# Altium PCB PCB1.PcbDoc
Units mm, origin at the board's own origin, x right, y up, seen from the top; angles counter-clockwise.
Board outline 30.61 x 25.65 mm, 4 copper layers (Top Layer, VCC, GND, Bottom Layer); 30 components, 36 nets, 171 pads, 102 vias.
Unrouted connection lines stored in the file: 1.
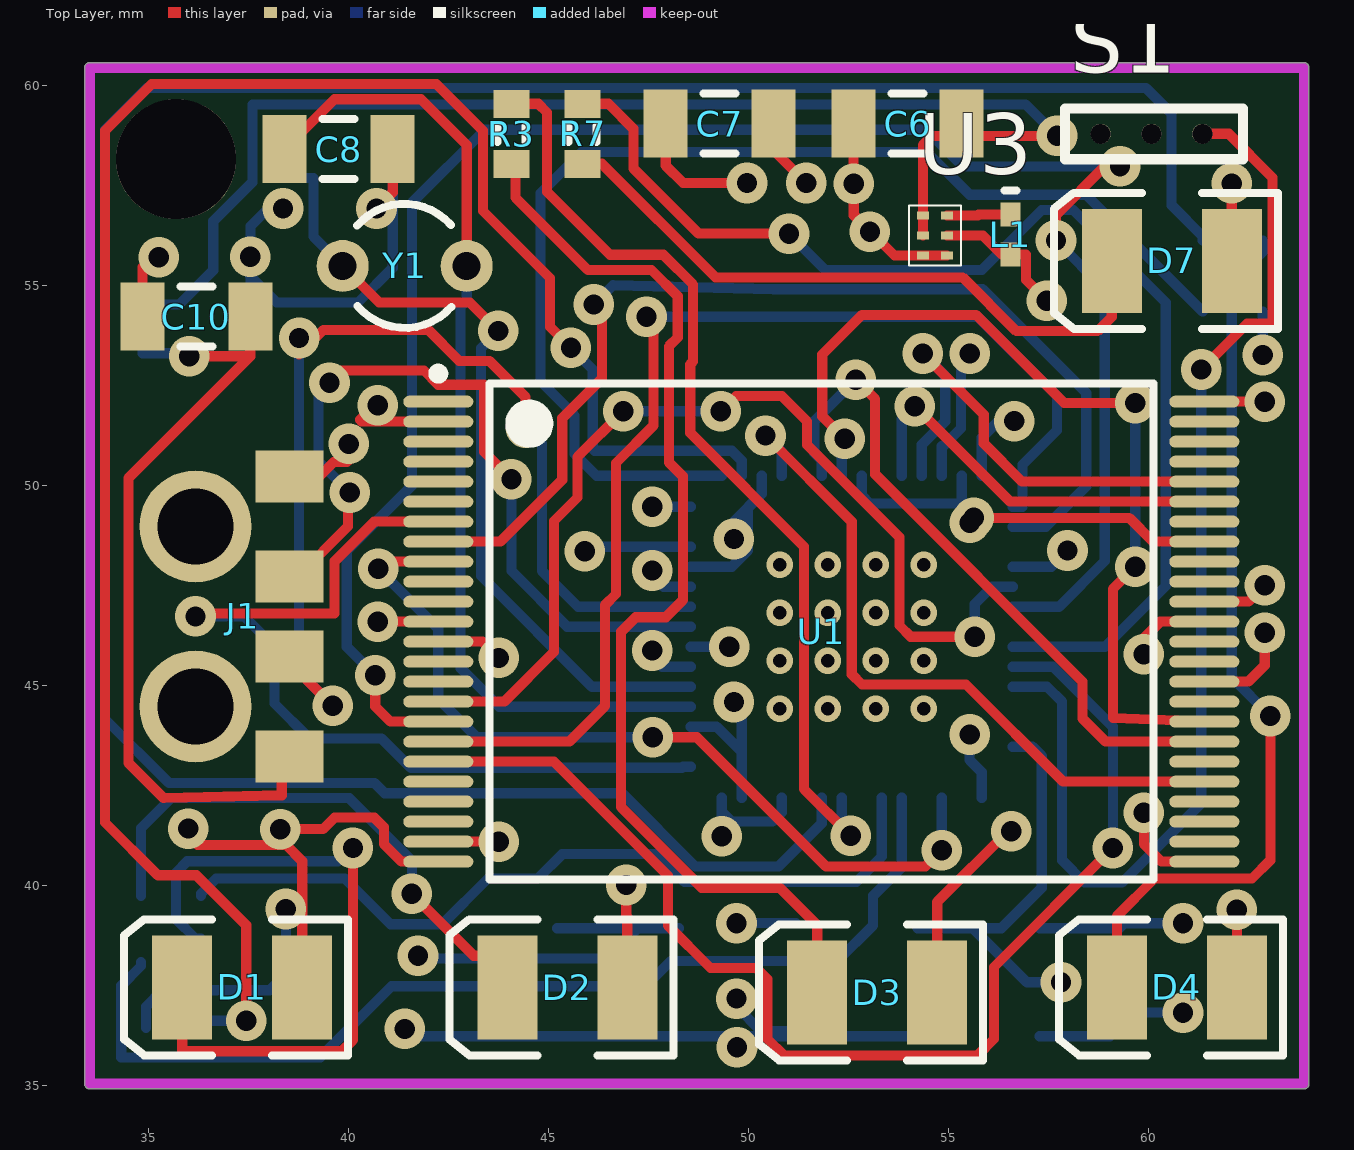
[diagram p0: Top Layer view]
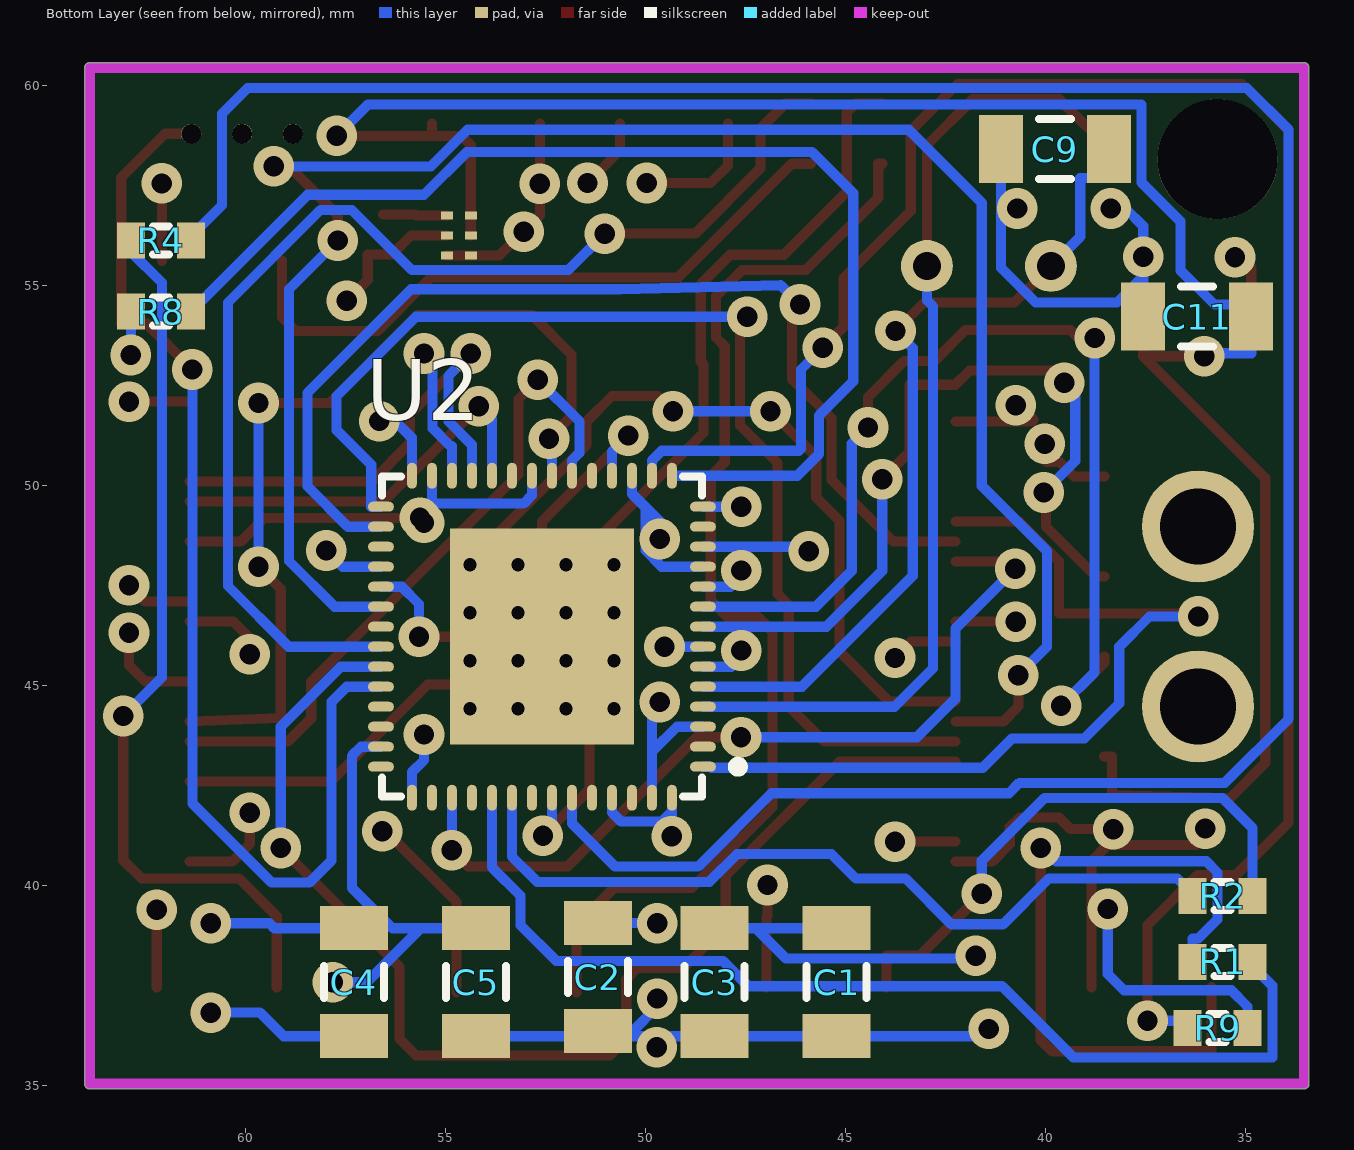
[diagram p1: Bottom Layer view, seen from below]
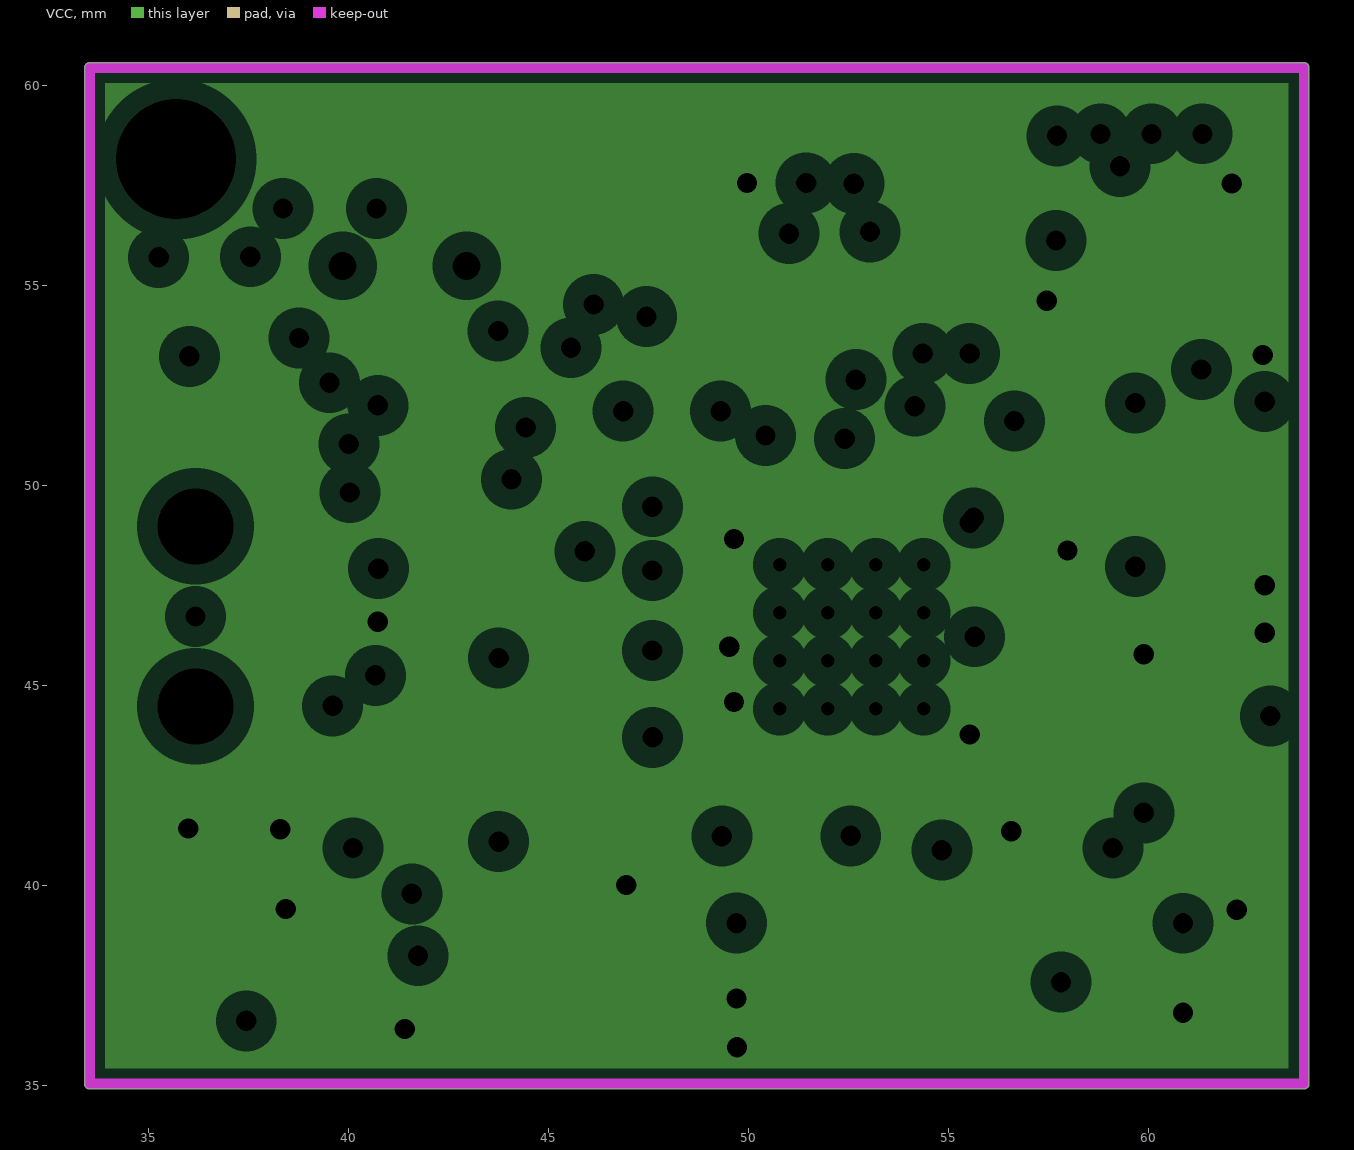
[diagram p2: VCC, clearances drawn from the general rule]
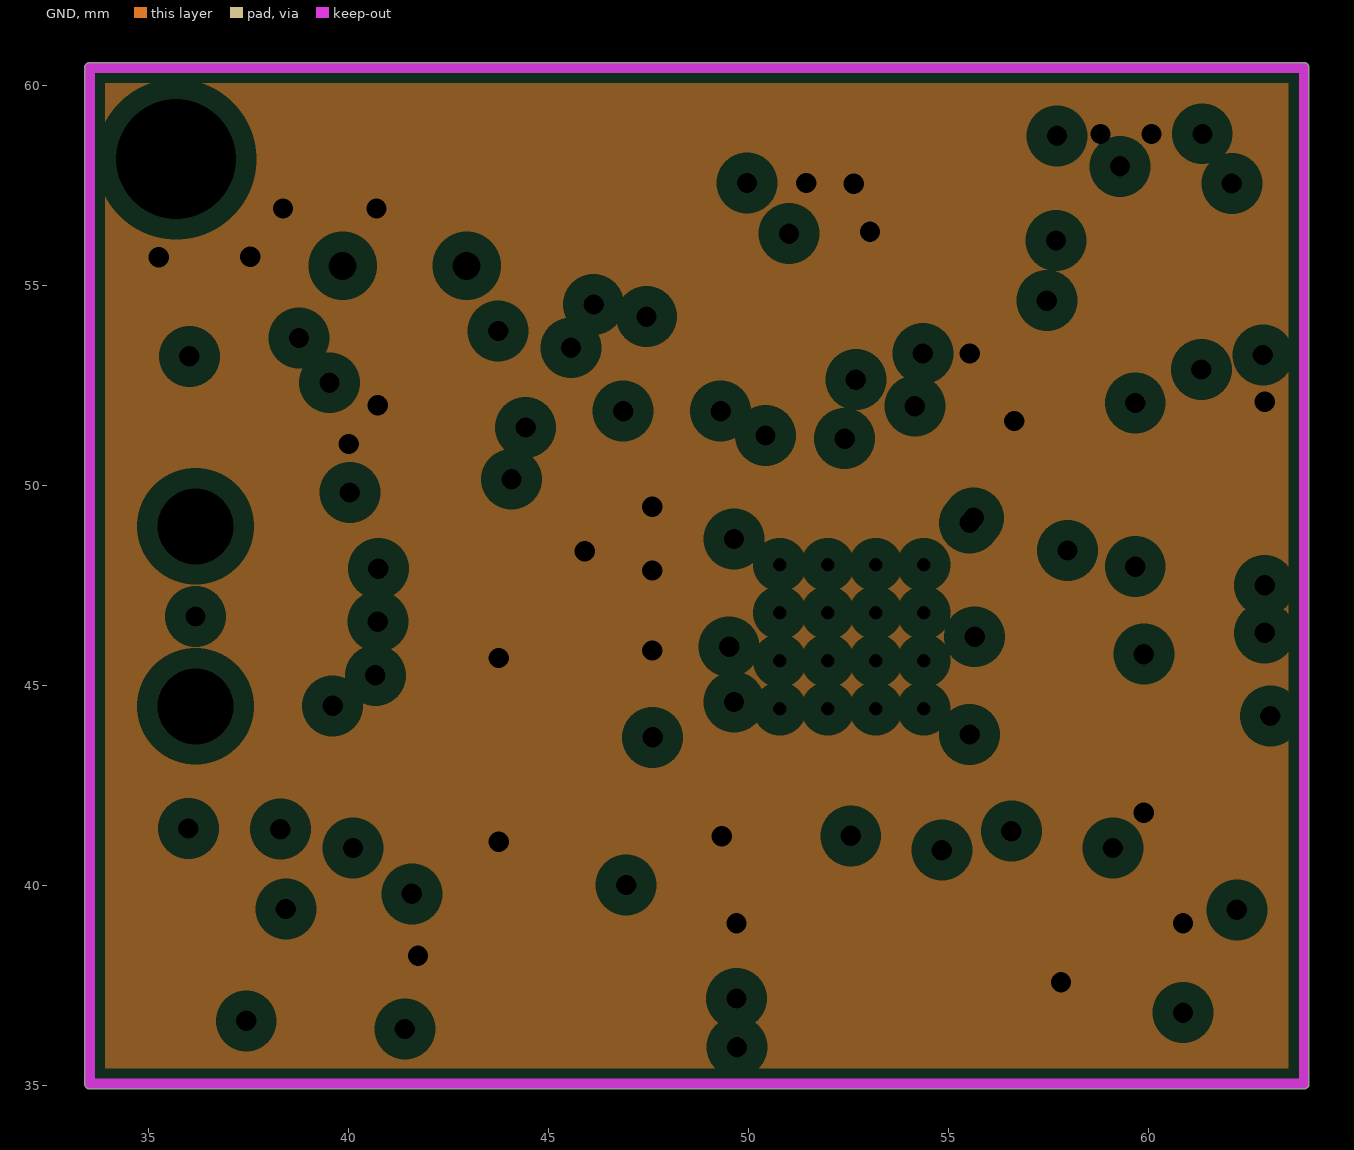
[diagram p3: GND, clearances drawn from the general rule]

## Layer stack, top to bottom
Top Layer: signal copper 0.0356
Dielectric: core 0.32, FR-4, Dk 4.8
VCC: plane copper 0.254, net V3_3
Dielectric: prepreg 0.32, FR-4, Dk 4.8
GND: plane copper 0.254, net GND
Dielectric: core 0.32, FR-4, Dk 4.8
Bottom Layer: signal copper 0.0356

## Board outline
33.528,34.925 cw(c33.528,35.052) 33.401,35.052 33.401,60.452 cw(c33.528,60.452) 33.528,60.579 63.881,60.579 cw(c63.881,60.452) 64.008,60.452 64.008,35.052 cw(c63.881,35.052) 63.881,34.925

## Design rules (kind name [scope] priority, off if disabled: settings)
Clearance [All] p1: gap=0.127
PlaneClearance [All] p1: clearance=0.508
PlaneConnect [All] p1: planeconnectstyle=Relief reliefexpansion=0.508 reliefentries=4 reliefconductorwidth=0.254 reliefairgap=0.254
PolygonConnect [All] p1: connectstyle=Relief reliefconductorwidth=0.254 reliefentries=4 polygonreliefangle="90 Angle" airgapwidth=0.254
RoutingVias [All] p1: holewidth=0.508 width=1.016 viastyle="Through Hole" minholewidth=0.508 minwidth=1.016 maxholewidth=0.508 maxwidth=1.016
SilkscreenOverComponentPads [All] p1: minsilkscreentomaskgap=0.254
SolderMaskExpansion [All] p1: expansion=0.102
Width [All] p1: maxlimit=0.254 minlimit=0.254 preferedwidth=0.254
25 further rules are at their usual default settings.

## Components (designator, comment, footprint, x,y, rotation, side; value= is the part's Value field where it differs from the comment)
C1 "Cap Semi" CAPC3216L 45.212,37.592 r270 bottom
C2 "Cap Semi" CAPC3216L 51.181,37.719 r270 bottom
C3 "Cap Semi" CAPC3216L 48.26,37.592 r270 bottom
C4 "Cap Semi" CAPC3216L 57.277,37.592 r270 bottom
C5 "Cap Semi" CAPC3216L 54.229,37.592 r270 bottom
C6 "Cap Semi" CAPC3216L 53.975,59.055 r180 top
C7 "Cap Semi" CAPC3216L 49.276,59.055 r180 top
C8 "Cap Semi" CAPC3216L 39.751,58.42 r180 top
C9 "Cap Semi" CAPC3216L 39.751,58.42 r180 bottom
C10 "Cap Semi" CAPC3216L 36.195,54.229 r0 top
C11 "Cap Semi" CAPC3216L 36.195,54.229 r180 bottom
D1 "LED3" DSO-C2/D5.6 37.338,37.465 r180 top
D2 "LED3" DSO-C2/D5.6 45.466,37.465 r180 top
D3 "LED3" DSO-C2/D5.6 53.213,37.338 r180 top
D4 "LED3" DSO-C2/D5.6 60.706,37.465 r180 top
D7 "LED3" DSO-C2/D5.6 60.579,55.626 r180 top
J1 "629004113921" 629004113921 28.321,46.736 r270 top
L1 "Inductor" INDC1005AL 56.543,56.281 r270 top
R1 "Res3" RESC1608L 35.56,38.1 r0 bottom
R2 "Res3" RESC1608L 35.56,39.751 r180 bottom
R3 "Res3" RESC1608L 44.069,58.801 r270 top
R4 "Res3" RESC1608L 62.103,56.134 r0 bottom
R7 "Res3" RESC1608L 45.847,58.801 r270 top
R8 "Res3" RESC1608L 62.103,54.356 r180 bottom
R9 "Res3" RESC1608L 35.687,36.449 r0 bottom
S1 "SW-SPDT" SW-SPDT 1033.907,953.77 r0 top
U1 "32GB memory" TSSOP50P2000X120-48N 51.816,46.355 r0 top
U2 "Memory Controller" QFN50P800X800X100-56N 52.578,46.228 r0 bottom
U3 "Voltage converter" USON 973.356,975.761 r0 top
Y1 "XTAL" BCY-W2/D3.1 41.402,55.499 r270 top

## Footprints (in the part's own frame and the unit in brackets; to place one, negate y for a bottom-side part, rotate by r counter-clockwise, add the part's x,y. Pads: shape width x height; smd on the part's side, far side on the other; paste and mask are expansions set on the pad)
629004113921 [mm] "USB 2.0 Plug Type A SMT with Clip"
  rect 1.3x1.7 smd: 1(3.5,10.2) 2(1,10.2) 3(-1,10.2) 4(-3.5,10.2)
  round 2.8 hole 1.9: Shell(-2.25,7.85) Shell(2.25,7.85)
  body extent -6,-9.4 6,10.4, height 2.25
BCY-W2/D3.1 [mm] "Crystal, Thru-Hole; 2 Leads; Body 3.1 x 8.2 mm (Dia.xH)"
  round 1.3 hole 0.7: 1(0,1.55) 2(0,-1.55)
  silkscreen extent -1.55,-1.19 1.55,1.17
CAPC3216L [mm] "Chip Capacitor, Body 3.2x1.6mm, IPC High Density"
  rect 1.1x1.7 smd: 1(-1.35,0) 2(1.35,0)
  silkscreen extent -0.4,-0.75 0.4,0.75, body extent -1.7,-0.9 1.7,0.9, height 1.3
DSO-C2/D5.6 [mm] "SM LED; 2 C-Bend Leads; Body 3.5 x 2.8 x 1.9 mm, inc leads (LxWxH typ)"
  rect 1.5x2.6 smd: 1(-1.5,0) 2(1.5,0)
  silkscreen extent -2.65,-1.7 2.95,1.7
INDC1005AL [mm] "Chip Inductor, Body 1.0x0.5mm, IPC High Density"
  rect 0.6x0.5 smd: 1(-0.5,0) 2(0.5,0)
  silkscreen extent -1.1,-0.15 -1.1,0.15, body extent -0.55,-0.3 0.55,0.3, height 0.55
QFN50P800X800X100-56N [mm] "QFN, 56-Leads, Body 8,0x8,0mm (max), Pitch 0,50mm, IPC Medium Density"
  oval 0.65x0.25 smd: 1(-4.025,3.25) 2(-4.025,2.75) 3(-4.025,2.25) 4(-4.025,1.75) 5(-4.025,1.25) 6(-4.025,0.75) 7(-4.025,0.25) 8(-4.025,-0.25) 9(-4.025,-0.75) 10(-4.025,-1.25) 11(-4.025,-1.75) 12(-4.025,-2.25) 13(-4.025,-2.75) 14(-4.025,-3.25) 29(4.025,-3.25) 30(4.025,-2.75) 31(4.025,-2.25) 32(4.025,-1.75) 33(4.025,-1.25) 34(4.025,-0.75) 35(4.025,-0.25) 36(4.025,0.25) 37(4.025,0.75) 38(4.025,1.25) 39(4.025,1.75) 40(4.025,2.25) 41(4.025,2.75) 42(4.025,3.25)
  oval 0.25x0.65 smd: 15(-3.25,-4.025) 16(-2.75,-4.025) 17(-2.25,-4.025) 18(-1.75,-4.025) 19(-1.25,-4.025) 20(-0.75,-4.025) 21(-0.25,-4.025) 22(0.25,-4.025) 23(0.75,-4.025) 24(1.25,-4.025) 25(1.75,-4.025) 26(2.25,-4.025) 27(2.75,-4.025) 28(3.25,-4.025) 43(3.25,4.025) 44(2.75,4.025) 45(2.25,4.025) 46(1.75,4.025) 47(1.25,4.025) 48(0.75,4.025) 49(0.25,4.025) 50(-0.25,4.025) 51(-0.75,4.025) 52(-1.25,4.025) 53(-1.75,4.025) 54(-2.25,4.025) 55(-2.75,4.025) 56(-3.25,4.025)
  rect 4.6x5.4 smd: 57(0,0)
  silkscreen extent -5.02,-4 4,4, body extent -4,-4 4,4, height 1
RESC1608L [mm] "Chip Resistor, Body 1.6x0.8mm, IPC High Density"
  rect 0.7x0.9 smd: 1(-0.75,0) 2(0.75,0)
  silkscreen extent -0.2,-0.35 0.2,0.35, body extent -0.85,-0.48 0.85,0.48, height 0.9
SW-SPDT [mm]
  round 0.5 hole 0.5: 1(-975.106,-894.969) 2(-973.836,-894.969) 3(-972.566,-894.969)
  silkscreen extent -976,-895.6 -971.55,-894.33
TSSOP50P2000X120-48N [mm] "TSSOP, 48-Leads, Body 12,4x18,5mm (max), Pitch 0,50mm, IPC Medium Density"
  oval 1.75x0.3 smd: 1(-9.575,5.75) 2(-9.575,5.25) 3(-9.575,4.75) 4(-9.575,4.25) 5(-9.575,3.75) 6(-9.575,3.25) 7(-9.575,2.75) 8(-9.575,2.25) 9(-9.575,1.75) 10(-9.575,1.25) 11(-9.575,0.75) 12(-9.575,0.25) 13(-9.575,-0.25) 14(-9.575,-0.75) 15(-9.575,-1.25) 16(-9.575,-1.75) 17(-9.575,-2.25) 18(-9.575,-2.75) 19(-9.575,-3.25) 20(-9.575,-3.75) 21(-9.575,-4.25) 22(-9.575,-4.75) 23(-9.575,-5.25) 24(-9.575,-5.75) 25(9.575,-5.75) 26(9.575,-5.25) 27(9.575,-4.75) 28(9.575,-4.25) 29(9.575,-3.75) 30(9.575,-3.25) 31(9.575,-2.75) 32(9.575,-2.25) 33(9.575,-1.75) 34(9.575,-1.25) 35(9.575,-0.75) 36(9.575,-0.25) 37(9.575,0.25) 38(9.575,0.75) 39(9.575,1.25) 40(9.575,1.75) 41(9.575,2.25) 42(9.575,2.75) 43(9.575,3.25) 44(9.575,3.75) 45(9.575,4.25) 46(9.575,4.75) 47(9.575,5.25) 48(9.575,5.75)
  silkscreen extent -9.7,-6.2 8.3,6.57, body extent -9.25,-6.2 9.25,6.2, height 1.2
USON [mm]
  rect 0.3x0.2 all layers, no hole: 1(-919,-919) 2(-919,-919.5) 3(-919,-920) 4(-918.4,-919) 5(-918.4,-919.5) 6(-918.4,-920)
  silkscreen extent -919.35,-920.25 -918.05,-918.75

## Part data
C1 C2 C3 C4 C5 C6 C7 C8 C9 C10 C11: "Capacitor (Semiconductor SIM Model)"
D1 D2 D3 D4 D7: "Typical BLUE SiC LED"
J1: "USB 2.0 Type A Plug WR-COM, Horizontal, SMT, with Clips"
R1 R2 R3 R4 R7 R8 R9: "Resistor"
S1: library part Component_4
U1: library part Component_2
U2: library part Component_1
U3: library part Component_3
Y1: "Crystal Oscillator"

## Free pads (board coordinates)
  round 3 hole 3: 0(35.687,58.166)

## Via types
v1: diameter 1.016, hole 0.508, Top Layer to Bottom Layer, 86 vias
v2: diameter 0.66, hole 0.33, Top Layer to Bottom Layer, tented top, 16 vias

## Nets (pads, with @x,y where several pads share a name; then routed paths per layer and width w, separated by ;. In a path a pad name is that pad's centre, name@x,y a point inside that pad or via, vN(x,y) a via of type N, cw(c..) or ccw(c..) an arc to the next point about the centre after c; other vN are vias at no path point)
ALE: U1.17 U2.34 | length 48.2
  Top Layer w0.254: v1(40.665,45.263) 40.665,44.486 41.046,44.105 U1.17 ; v1(57.683,56.134) 57.683,56.769 58.903,57.988 v1(59.284,57.988)
  Bottom Layer w0.254: v1(40.665,45.263) 39.954,45.974 39.954,48.376 41.58,50.001 41.58,57.074 43.409,58.903 54.438,58.903 55.352,57.988 v1(59.284,57.988) ; U2.34 57.761,46.978 58.903,48.12 58.903,54.915 v1(57.683,56.134)
CE: U1.9 U2.45 | length 21.2
  Top Layer w0.254: v1(40.742,47.93) 40.917,48.105 U1.9 ; v1(47.6,43.713) 48.705,43.713 51.931,40.488 54.422,40.488 v1(54.828,40.894)
  Bottom Layer w0.254: v1(40.742,47.93) 42.24,46.431 42.24,44.679 43.205,43.713 v1(47.6,43.713) ; v1(54.828,40.894) U2.45
CLE: U1.16 U2.33 | length 25.2
  Top Layer w0.254: U1.16 43.891,44.605 45.135,45.849 45.135,49.124 45.72,49.708 45.72,50.724 v1(46.863,51.867) ; v1(49.301,51.867) 49.682,52.248 50.825,52.248 51.46,51.613 51.46,51.029 53.772,48.717 53.772,46.507 54.051,46.228 v1(55.651,46.228)
  Bottom Layer w0.254: v1(46.863,51.867) v1(49.301,51.867) ; v1(55.651,46.228) 55.651,47.046 56.083,47.478 U2.33
DD0: U1.29 U2.18 | length 18
  Top Layer w0.254: v1(50.422,51.257) 52.578,49.101 52.578,45.288 52.832,45.034 55.432,45.034 57.861,42.605 U1.29
  Bottom Layer w0.254: v1(50.422,51.257) 50.828,50.851 U2.18
DD1: U2.19
DD2: U1.31 U2.20 | length 17
  Top Layer w0.254: v1(52.68,52.654) 53.162,52.172 53.162,50.292 58.344,45.11 58.344,44.189 58.928,43.605 U1.31
  Bottom Layer w0.254: U2.20 51.828,50.636 51.638,50.825 51.638,51.613 v1(52.68,52.654)
DD3: U1.32 U2.21 | length 22.8
  Top Layer w0.254: v1(52.4,51.181) 51.841,51.74 51.841,53.284 52.832,54.274 55.682,54.274 57.887,52.07 v1(59.665,52.07) ; v1(59.665,47.981) 59.106,47.422 59.106,44.196 U1.32
  Bottom Layer w0.254: U2.21 52.328,51.109 v1(52.4,51.181) ; v1(59.665,47.981) v1(59.665,52.07)
DD4: U1.41 U2.22 | length 9.5
  Top Layer w0.254: v1(55.626,49.2) 59.512,49.2 60.107,48.605 U1.41
  Bottom Layer w0.254: U2.22 52.828,49.763 53.035,49.555 55.27,49.555 v1(55.626,49.2)
DD5: U1.42
DD6: U1.43 U2.24 | length 10.1
  Top Layer w0.254: v1(54.153,51.994) 56.542,49.605 U1.43
  Bottom Layer w0.254: U2.24 53.828,51.669 v1(54.153,51.994)
DD7: U1.44 U2.25 | length 12.3
  Top Layer w0.254: v1(54.356,53.309) 55.879,51.786 55.879,51.062 56.836,50.105 U1.44
  Bottom Layer w0.254: U2.25 54.328,51.027 54.915,51.614 54.915,52.75 v1(54.356,53.309)
DMINUS: J1.2 U2.9 | length 26.8
  Top Layer w0.254: J1.2 38.521,45.578 v1(39.599,44.501) ; v1(38.76,53.696) 38.76,53.289 39.37,53.899 41.986,53.899 42.759,53.126 43.516,53.126 44.425,52.217 v1(44.425,51.46)
  Bottom Layer w0.254: v1(38.76,53.696) 38.76,45.339 v1(39.599,44.501) ; v1(44.425,51.46) 44.831,51.054 44.831,47.879 45.732,46.978 U2.9
DPLUS: J1.3 U2.8 | length 20.4
  Top Layer w0.254: J1.3 38.732,47.736 39.98,48.983 39.98,49.835 v1(40.03,49.835) ; v1(39.522,52.578) 39.827,52.883 41.885,52.883 42.24,52.527 43.383,52.527 43.383,50.851 v1(44.069,50.165)
  Bottom Layer w0.254: v1(39.522,52.578) 39.243,52.578 39.243,50.622 v1(40.03,49.835) ; v1(44.069,50.165) 44.069,47.875 45.466,46.478 U2.8
GND: C1.1 C2.1 C3.1 C4.1 C5.1 C6.2 C7.1 C8.1 C9.1 C10.1 C11.1 J1.4 S1.1 S1.2 U1.2 U1.13 U1.23 U1.25 U1.36 U1.48 U2.6 U2.10 U2.12 U2.14 U2.26 U2.28 U2.41 U2.53 U2.56 U3.3 U3.6 | length 73.2
  Top Layer w0.254: C10.1 34.845,55.474 35.085,55.714 v1(35.251,55.714) ; J1.4 39.268,50.236 39.629,50.597 39.96,50.597 40.006,50.642 v1(40.006,51.049) ; v1(40.695,56.935) 41.101,57.341 C8.1 ; v1(40.731,52.011) 40.64,52.011 40.284,51.656 40.284,51.645 40.325,51.605 U1.2 ; U1.23 v1(43.751,41.105) ; U1.13 43.345,46.105 v1(43.751,45.699) ; C7.1 50.626,58.383 v1(51.439,57.57) ; C6.2 52.625,56.757 v1(53.031,56.351) ; v1(52.629,57.556) 52.629,56.777 53.645,55.761 U3.3 U3.6 ; v1(59.881,41.824) 59.881,41.046 60.322,40.605 U1.25 ; U1.48 v1(62.901,52.105)
  Bottom Layer w0.254: v1(37.541,55.728) 37.541,55.245 v1@37.545,55.241 ; C11.1 v1@37.545,55.241 ; v1(38.358,56.933) 37.989,56.933 37.545,56.49 v1@37.545,55.241 ; C9.1 41.101,55.452 40.234,54.585 38.202,54.585 v1@37.545,55.241 ; v1(41.733,38.252) 41.733,38.18 46.468,38.18 47.23,38.942 ; C1.1 47.23,38.942 ; v1(45.904,48.362) 46.02,48.478 U2.12 ; v1(47.593,45.884) 47.593,45.72 47.835,45.478 U2.6 ; v1(47.593,47.884) 47.593,47.752 47.867,47.478 U2.10 ; v1(47.593,49.478) U2.14 ; C3.1 47.23,38.942 ; v1(49.328,41.243) 49.328,41.858 ; U2.56 49.328,41.858 ; v1(49.696,39.069) C2.1 ; U2.53 50.828,41.836 50.597,41.605 49.581,41.605 49.328,41.858 ; C5.1 55.605,38.942 ; U2.26 54.828,50.988 54.832,50.992 54.864,50.992 55.31,51.438 55.31,53.094 v1(55.524,53.309) ; U2.28 55.828,51.206 56.241,51.619 v1(56.641,51.619) ; U2.41 57.099,43.478 57.328,43.249 57.328,39.954 56.316,38.942 55.605,38.942 ; C4.1 59.266,38.942 59.39,39.065 v1(60.857,39.065) ; v1(57.809,37.592) 56.955,37.592 55.605,38.942
NetD1_2: D1.2 R1.2 | length 18
  Top Layer w0.254: D1.2 35.838,35.865 39.827,35.865 40.107,36.144 v1(40.107,40.945)
  Bottom Layer w0.254: R1.2 36.31,38.684 36.17,38.684 35.687,39.167 35.687,40.335 35.966,40.615 39.726,40.615 40.056,40.945 v1(40.107,40.945)
NetD2_2: D2.2 R2.2 | length 14.1
  Top Layer w0.254: v1(41.58,39.802) 43.129,38.252 43.966,38.252 D2.2
  Bottom Layer w0.254: R2.2 34.81,41.444 35.56,42.194 40.016,42.194 41.58,40.63 v1(41.58,39.802)
NetD3_2: D3.2 R3.2 | length 27.9
  Top Layer w0.254: R3.2 44.171,58.051 44.171,57.206 45.979,55.397 47.569,55.397 48.227,54.74 48.227,53.708 48.006,53.487 48.006,50.589 48.355,50.24 48.355,47.142 47.929,46.716 47.173,46.716 46.812,46.355 46.812,41.967 48.825,39.954 50.773,39.954 51.713,39.014 D3.2
NetD4_2: D4.2 R4.2 | length 22.4
  Top Layer w0.254: D4.2 59.206,39.242 60.147,40.183 62.586,40.183 63.043,40.64 v1(63.043,44.247)
  Bottom Layer w0.254: R4.2 62.853,55.855 62.078,55.079 62.078,45.212 v1(63.043,44.247)
NetD7_2: D7.2 R7.2 | length 16.5
  Top Layer w0.254: R7.2 46.33,58.051 49.169,55.211 55.35,55.211 56.693,53.868 58.725,53.868 59.079,54.222 D7.2
NetL1_1: L1.1 U3.4 | length 1.6
  Top Layer w0.254: U3.4 55.728,56.761 55.748,56.781 L1.1
NetR1_1: R1.1 U2.47 | length 26.2
  Bottom Layer w0.254: R1.1 34.81,37.998 34.315,37.504 34.315,35.712 39.294,35.712 41.072,37.49 47.422,37.49 48.057,38.125 52.222,38.125 53.111,39.014 53.111,39.751 53.828,40.468 U2.47
NetR2_1: R2.1 U2.48 | length 20.4
  Bottom Layer w0.254: R2.1 36.31,39.802 36.691,40.183 39.903,40.183 41.046,39.04 42.342,39.04 43.485,40.183 44.729,40.183 45.339,40.792 47.701,40.792 48.394,40.1 52.695,40.1 53.328,40.733 U2.48
NetR3_1: R3.1 U2.50 | length 24.1
  Top Layer w0.254: R3.1 44.741,59.551 44.958,59.334 44.958,57.352 46.531,55.778 47.868,55.778 48.608,55.038 48.608,53.106 48.539,53.038 48.539,51.324 51.384,48.479 51.384,42.418 v1(52.553,41.25)
  Bottom Layer w0.254: U2.50 52.328,41.474 v1(52.553,41.25)
NetR4_1: R4.1 U2.51 | length 66.1
  Bottom Layer w0.254: U2.51 51.828,41.566 50.743,40.481 48.673,40.481 46.838,42.316 40.899,42.316 40.641,42.575 35.505,42.575 33.909,44.171 33.909,58.903 34.95,59.944 59.936,59.944 60.575,59.305 60.575,57.014 61.353,56.236 R4.1
NetR7_1: R7.1 U2.36 | length 30
  Top Layer w0.254: R7.1 46.494,59.551 47.117,58.928 47.117,57.937 48.748,56.306 v1(51.009,56.306)
  Bottom Layer w0.254: v1(51.009,56.306) 51.918,55.397 55.829,55.397 57.328,56.896 58.115,56.896 60.427,54.585 60.427,47.498 58.907,45.978 U2.36
NetR8_2: R8.2 U2.15 | length 29.4
  Bottom Layer w0.254: U2.15 46.195,50.253 45.648,50.8 45.648,51.761 44.794,52.615 44.794,57.317 45.822,58.344 54.458,58.344 55.524,57.277 58.432,57.277 R8.2
NetR9_2: R9.2 U2.16 | length 49.2
  Top Layer w0.254: v1(37.44,36.627) 37.44,39.014 36.19,40.264 35.231,40.264 33.909,41.586 33.909,58.877 35.077,60.046 42.189,60.046 43.358,58.877 43.358,56.871 45.031,55.197 45.031,53.978 v1(45.556,53.453)
  Bottom Layer w0.254: R9.2 36.437,36.627 v1(37.44,36.627) ; v1(45.556,53.453) 46.101,52.908 46.101,50.927 46.152,50.876 49.581,50.876 49.828,50.629 U2.16
NetS1_3: S1.3 U2.38 | length 28.8
  Top Layer w0.254: v1(61.316,52.908) 62.459,54.051 63.094,54.051 63.094,57.709 62.001,58.801 S1.3
  Bottom Layer w0.254: U2.38 57.46,44.978 57.836,44.602 57.836,40.64 58.395,40.081 59.334,40.081 61.316,42.062 v1(61.316,52.908)
R/B: U1.7 U2.1 | length 22.6
  Top Layer w0.254: v1(36.17,46.736) 36.246,46.812 39.649,46.812 39.649,48.114 40.64,49.105 U1.7
  Bottom Layer w0.254: v1(36.17,46.736) 37.389,46.736 38.145,45.98 38.145,44.557 39.014,43.688 40.818,43.688 41.554,42.951 48.335,42.951 48.362,42.978 U2.1
RE: U1.8 U2.30 | length 26.8
  Top Layer w0.254: U1.8 43.789,48.605 45.339,50.155 45.339,51.689 46.33,52.68 46.33,54.331 v1(46.126,54.534)
  Bottom Layer w0.254: v1(46.126,54.534) 46.609,55.016 50.622,54.915 55.849,54.915 58.439,52.325 58.439,49.988 57.429,48.978 U2.30
V3_3: C1.2 C2.2 C3.2 C4.2 C5.2 C7.2 D1.1 D2.1 D3.1 D4.1 D7.1 L1.2 R8.1 R9.1 U1.12 U1.24 U1.34 U1.37 U1.38 U2.3 U2.7 U2.11 U2.17 U2.27 U2.32 U2.43 U2.55 U3.5 | length 77.8
  Top Layer w0.254: v1(35.993,41.432) 35.993,41.25 36.217,41.026 38.432,41.026 38.838,40.619 D1.1 ; v1(38.293,41.418) 39.357,41.418 39.646,41.707 40.64,41.707 40.881,41.465 40.881,41.046 41.323,40.605 U1.24 ; v1(40.731,46.605) U1.12 ; v1(46.939,40.022) 46.939,39.243 46.966,39.216 D2.1 ; C7.2 47.926,58.006 48.362,57.57 v1(49.958,57.57) ; D3.1 54.713,39.6 56.482,41.369 v1(56.566,41.369) ; U3.5 55.852,56.261 56.332,55.781 L1.2 56.932,55.781 56.932,55.153 v1(57.455,54.63) ; v1(59.881,45.792) 59.881,46.199 60.287,46.605 U1.37 ; U1.34 62.489,45.105 62.901,45.517 v1(62.901,46.324) ; U1.38 62.495,47.105 v1(62.901,47.511) ; D7.1 v1(62.079,57.561) ; D4.1 v1(62.206,39.4)
  Bottom Layer w0.254: R9.1 34.937,36.982 35.343,37.389 38.024,37.389 38.43,37.795 v1(38.43,39.421) ; v1(41.403,36.424) 41.403,36.242 C1.2 C3.2 v1@49.432,36.242 ; U2.3 49.2,43.978 49.828,43.35 ; U2.7 v1(49.513,45.978) ; U2.11 49.581,47.978 49.987,48.384 49.987,49.454 50.328,49.795 50.328,49.812 ; v1(49.632,44.598) 49.828,44.402 49.828,43.35 ; v1(49.632,48.671) 49.632,49.115 50.328,49.812 ; v1(49.696,37.182) 49.696,36.982 50.309,36.369 C2.2 ; v1(49.708,35.966) v1@49.432,36.242 ; U2.55 49.828,43.35 ; U2.17 50.328,49.812 ; C5.2 51.181,36.242 v1@49.432,36.242 ; U2.27 55.328,49.562 55.524,49.365 v1(55.524,49.077) ; v1(55.524,43.785) 55.524,43.144 55.828,42.841 U2.43 ; U2.32 57.563,47.978 v1(57.969,48.384) ; C4.2 59.034,36.242 59.622,36.83 v1(60.857,36.83) ; v1(62.853,53.271) R8.1
V5: C6.1 C10.2 C11.2 J1.1 U3.1 U3.2 | length 55.9
  Top Layer w0.254: v1(36.017,53.238) 37.541,53.238 ; J1.1 38.329,43.236 38.329,42.266 35.378,42.194 34.493,43.078 34.493,50.19 37.541,53.238 ; U3.2 U3.1 54.356,58.522 54.585,58.75 C6.1@55.325,58.75 ; C6.1 C6.1@55.325,58.75 ; v1(57.709,58.75) C6.1@55.325,58.75 ; 37.541,53.238 37.545,53.242 C10.2 37.541,53.238
  Bottom Layer w0.254: v1(36.017,53.238) 35.941,53.315 34.845,53.315 C11.2 34.845,54.534 35.763,54.534 36.616,55.387 36.616,56.614 37.592,57.59 37.592,59.538 56.921,59.538 v1(57.709,58.75)
WE: U1.18 U2.29 | length 29.4
  Top Layer w0.254: U1.18 45.517,43.605 46.406,44.494 46.406,47.015 46.685,47.295 46.685,50.571 47.625,51.511 47.625,54.229 v1(47.447,54.229)
  Bottom Layer w0.254: v1(47.447,54.229) 55.728,54.229 57.709,52.248 57.709,51.391 56.845,50.528 56.845,49.478 U2.29
WP: U1.19 U2.37 | length 30.9
  Top Layer w0.254: U1.19 45.135,43.105 47.981,40.259 47.981,39.014 49.047,37.948 50.19,37.948 50.47,37.668 50.47,36.17 50.876,35.763 55.728,35.763 56.134,36.17 56.134,37.973 v1(59.106,40.945)
  Bottom Layer w0.254: U2.37 57.607,45.478 59.106,43.979 v1(59.106,40.945)
XTALN: C8.2 U2.4 Y1.1 | length 24.8
  Top Layer w0.254: C8.2 39.646,59.665 41.809,59.665 42.952,58.522 Y1.1
  Bottom Layer w0.254: Y1.1 42.952,54.64 42.799,54.487 42.799,45.441 43.762,44.478 U2.4
XTALP: C9.2 U2.5 Y1.2 | length 21.2
  Top Layer w0.254: Y1.2 40.766,54.585 43.028,54.585 v1(43.739,53.873)
  Bottom Layer w0.254: C9.2 38.401,57.695 39.12,57.695 39.12,56.231 Y1.2 ; v1(43.739,53.873) 43.307,53.442 43.307,47.752 46.081,44.978 U2.5
pads on no net: J1.Shell U1.1 U1.3 U1.4 U1.5 U1.6 U1.10 U1.11 U1.14 U1.15 U1.20 U1.21 U1.22 U1.26 U1.27 U1.28 U1.30 U1.33 U1.35 U1.39 U1.40 U1.45 U1.46 U1.47 U2.2 U2.13 U2.23 U2.31 U2.35 U2.39 U2.40 U2.42 U2.44 U2.46 U2.49 U2.52 U2.54 U2.57
copper on no net:
  other v2: 50.778,44.428 51.978,44.428 53.178,44.428 54.378,44.428 50.778,45.628 51.978,45.628 53.178,45.628 54.378,45.628 50.778,46.828 51.978,46.828 53.178,46.828 54.378,46.828 50.778,48.028 51.978,48.028 53.178,48.028 54.378,48.028

## Polygon pours and split planes (outlines as drawn)
V3_3 on VCC (split plane): 63.498,35.435 33.911,35.435 33.911,60.069 63.498,60.069
GND on GND (split plane): 63.498,35.435 33.911,35.435 33.911,60.069 63.498,60.069

## Keep-outs
Keep-Out Layer:
  lines w0.254: 33.528,35.052 33.528,59.055 33.528,59.436 33.528,60.452 63.881,60.452 63.881,35.052 33.528,35.052

## Silkscreen, mask and mechanical layers (free items; w line width, h text height)
Mechanical 1:
  lines w0.254: 33.528,35.052 33.528,60.452 63.881,60.452 63.881,35.052 33.528,35.052

## Text inside footprints (layer, text, board x,y; h text height)
J1: Mechanical 2 "PCB Edge" at 32.871,48.736 h0.61 r270